# EAGLE board SysnapseWriless-BOB-bare-v2a (EAGLE 5.10)
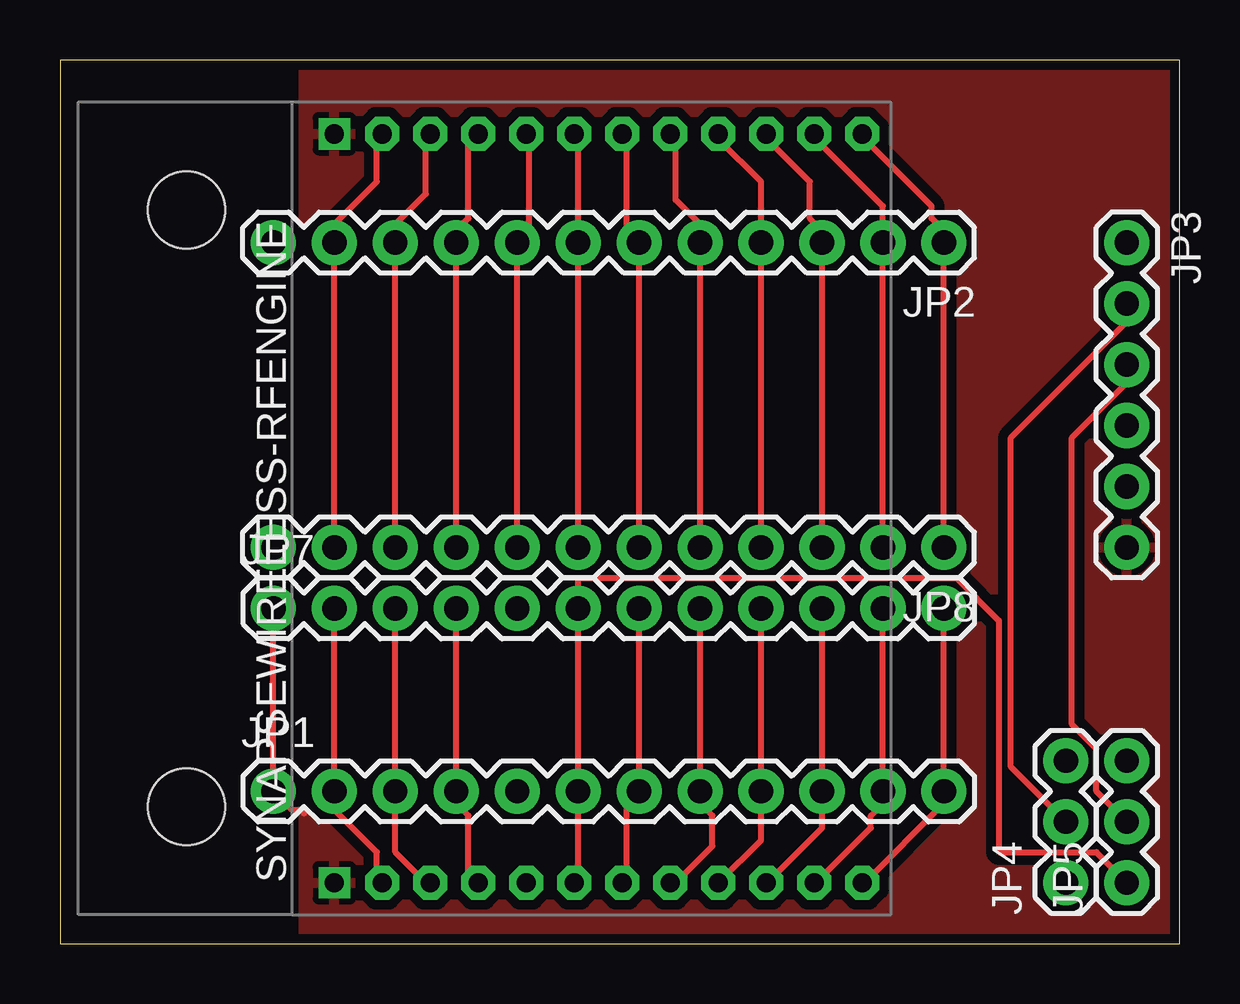
[diagram p0: board, top side]
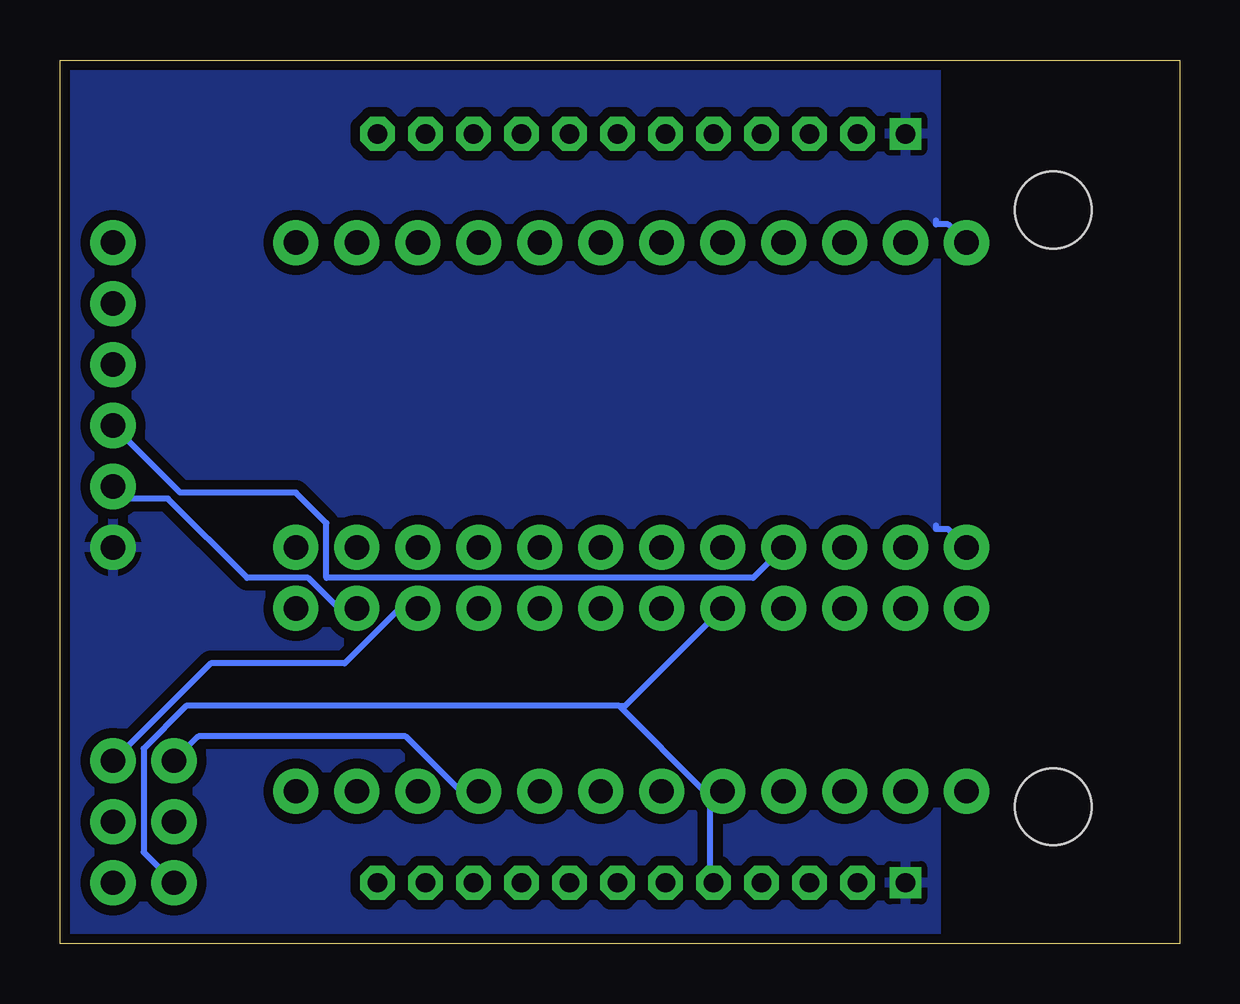
[diagram p1: board, bottom side, seen from below]

Size 46.66 x 36.82 mm. Coordinates in mm from the lower left corner, seen from the top.
Outline: 0,0 46.66,0 46.66,36.82 0,36.82 0,0
Copper layers (1*16): Top 0.035mm / dielectric 1.5mm / Bottom 0.035mm
Design rules "Fusion_eagle_rule_v1.1": minimum track width 6mil, minimum drill 12mil, track to track 6mil, track to pad 6mil, pad to pad 6mil, via to via 6mil, smd to smd 0mil, copper to edge 10mil, drill to drill 10mil, minimum pad ring 10mil, minimum via ring 6mil, stop-mask expansion 2mil, vias tented up to drill 100mil, thermal gap 10mil

## Footprints (pad centres in the part's own frame; a part is rotated, then mirrored left to right if it is on the bottom)
1X12 = drill 1.016 pad 1.88 round: 1 0,0; 2 2.54,0; 3 5.08,0; 4 7.62,0; 5 10.16,0; 6 12.7,0; 7 15.24,0; 8 17.78,0; 9 20.32,0; 10 22.86,0; 11 25.4,0; 12 27.94,0
1X06 = drill 1.016 pad 1.88 round: 1 0,0; 2 2.54,0; 3 5.08,0; 4 7.62,0; 5 10.16,0; 6 12.7,0
1X03 = drill 1.016 pad 1.88 round: 1 0,0; 2 2.54,0; 3 5.08,0
SYNAPSERF100 = drill 0.8 square: 1 0,0; 24 31.2,0 | drill 0.8 pad 1.422 octagon: 2 0,-2; 3 0,-4; 4 0,-6; 5 0,-8; 6 0,-10; 7 0,-12; 8 0,-14; 9 0,-16; 10 0,-18; 11 0,-20; 12 0,-22; 13 31.2,-22; 14 31.2,-20; 15 31.2,-18; 16 31.2,-16; 17 31.2,-14; 18 31.2,-12; 19 31.2,-10; 20 31.2,-8; 21 31.2,-6; 22 31.2,-4; 23 31.2,-2 | hole 3.2: 3.17,6.16; 28.03,6.16

## Placement (x,y rotation side)
JP1  M12PTH  [1X12]  8.89,6.35 0 top
JP2  M12PTH  [1X12]  36.83,29.21 180 top
JP3  [1X06]  44.45,29.21 270 top
JP4  JUMPER-3PTH  [1X03]  41.91,2.54 90 top
JP5  JUMPER-3PTH  [1X03]  44.45,2.54 90 top
JP7  M12PTH  [1X12]  8.89,13.97 0 top
JP8  M12PTH  [1X12]  36.83,16.51 180 top
SYNAPSEWIRELESS-RFENGINE  SYNAPSEWIRELESS-RFENGINESTD  [SYNAPSERF100]  11.43,2.54 90 top

## Library data of the parts
JP1-JP5 JP7 JP8 = SparkFun
SYNAPSEWIRELESS-RFENGINE = 0_jc-custom

## Nets
GND: JP1.1 JP2.12 JP3.6 JP7.1 JP8.12 SYNAPSEWIRELESS-RFENGINE.1 SYNAPSEWIRELESS-RFENGINE.24
GPIO0: JP1.2 JP7.2 SYNAPSEWIRELESS-RFENGINE.2
GPIO1: JP1.3 JP7.3 SYNAPSEWIRELESS-RFENGINE.3
GPIO2: JP1.4 JP7.4 SYNAPSEWIRELESS-RFENGINE.4
GPIO3: JP1.5 JP4.1 JP7.5 SYNAPSEWIRELESS-RFENGINE.5
GPIO4: JP1.6 JP5.1 JP7.6 SYNAPSEWIRELESS-RFENGINE.6
GPIO5: JP1.7 JP7.7 SYNAPSEWIRELESS-RFENGINE.7
GPIO6: JP1.8 JP7.8 SYNAPSEWIRELESS-RFENGINE.8
GPIO7: JP1.9 JP4.3 JP7.9 SYNAPSEWIRELESS-RFENGINE.9
GPIO8: JP1.10 JP5.3 JP7.10 SYNAPSEWIRELESS-RFENGINE.10
GPIO9: JP1.11 JP3.5 JP7.11 SYNAPSEWIRELESS-RFENGINE.11
GPIO10: JP1.12 JP7.12 SYNAPSEWIRELESS-RFENGINE.12
GPIO11: JP2.1 JP8.1 SYNAPSEWIRELESS-RFENGINE.13
GPIO12: JP2.2 JP8.2 SYNAPSEWIRELESS-RFENGINE.14
GPIO13: JP2.3 JP8.3 SYNAPSEWIRELESS-RFENGINE.15
GPIO14: JP2.4 JP8.4 SYNAPSEWIRELESS-RFENGINE.16
GPIO15: JP2.5 JP8.5 SYNAPSEWIRELESS-RFENGINE.17
GPIO16: JP2.6 JP8.6 SYNAPSEWIRELESS-RFENGINE.18
GPIO17: JP2.7 JP8.7 SYNAPSEWIRELESS-RFENGINE.19
GPIO18: JP2.8 JP8.8 SYNAPSEWIRELESS-RFENGINE.20
N$3: JP2.10 JP8.10 SYNAPSEWIRELESS-RFENGINE.22
N$7: JP3.1
RESET_L: JP2.11 JP8.11 SYNAPSEWIRELESS-RFENGINE.23
RXI: JP3.2 JP4.2
TXO: JP3.3 JP5.2
VCC: JP2.9 JP3.4 JP8.9 SYNAPSEWIRELESS-RFENGINE.21

## Tracks (layer width: path | path; a pad name or v marks a point on that pad's centre or on a via)
GND
  Top 0.254: 10.16,5.43 10.16,5.59 9.65,5.59 JP1.1 JP7.1
  Bottom 0.254: JP8.12 9.65,17.27 10.16,17.27 10.16,17.43 | JP2.12 9.65,29.97 10.16,29.97 10.16,30.13
  pour Bottom (isolate 0.406): 10.16,36.83 46.99,36.83 46.99,0 10.16,0
  pour Top (isolate 0.406): 10.16,36.83 46.99,36.83 46.99,0 10.16,0
GPIO0
  Top 0.254: SYNAPSEWIRELESS-RFENGINE.2 13.21,2.54 13.21,3.81 11.43,5.59 JP1.2 JP7.2
GPIO1
  Top 0.254: SYNAPSEWIRELESS-RFENGINE.3 15.24,2.54 13.97,3.81 JP1.3 JP7.3
GPIO2
  Top 0.254: SYNAPSEWIRELESS-RFENGINE.4 17.27,2.54 17.02,2.79 17.02,5.33 16.51,5.84 JP1.4 JP7.4
GPIO3
  Bottom 0.254: 19.56,6.35 19.56,2.54 SYNAPSEWIRELESS-RFENGINE.5 | JP4.1 43.18,3.81 43.18,8.13 41.4,9.91 23.37,9.91 | 23.37,9.91 19.81,6.35 19.56,6.35 | 19.56,6.35 JP1.5 | JP7.5 23.11,9.91 23.37,9.91
GPIO4
  Top 0.254: SYNAPSEWIRELESS-RFENGINE.6 21.59,2.54 JP1.6 JP7.6 21.59,15.24 37.34,15.24 39.12,13.46 39.12,3.81 43.18,3.81 JP5.1
GPIO5
  Top 0.254: SYNAPSEWIRELESS-RFENGINE.7 23.62,2.54 23.62,6.35 JP1.7 JP7.7
GPIO6
  Top 0.254: SYNAPSEWIRELESS-RFENGINE.8 25.65,2.54 27.18,4.06 27.18,5.33 26.67,5.84 JP1.8 JP7.8
GPIO7
  Top 0.254: SYNAPSEWIRELESS-RFENGINE.9 29.21,4.32 JP1.9 JP7.9
  Bottom 0.254: JP4.3 40.89,8.64 32.26,8.64 29.97,6.35 JP1.9
GPIO8
  Top 0.254: SYNAPSEWIRELESS-RFENGINE.10 29.46,2.54 31.75,4.83 JP1.10 JP7.10
  Bottom 0.254: JP5.3 40.39,11.68 34.8,11.68 32.51,13.97 JP7.10
GPIO9
  Top 0.254: SYNAPSEWIRELESS-RFENGINE.11 31.5,2.54 33.78,4.83 33.78,5.33 34.29,5.84 JP1.11 JP7.11
  Bottom 0.254: JP3.5 43.94,18.54 42.16,18.54 38.86,15.24 36.32,15.24 35.05,13.97 JP7.11
GPIO10
  Top 0.254: SYNAPSEWIRELESS-RFENGINE.12 33.53,2.54 36.83,5.84 JP1.12 JP7.12
GPIO11
  Top 0.254: SYNAPSEWIRELESS-RFENGINE.13 33.53,33.53 36.32,30.73 36.32,30.23 36.83,29.72 JP2.1 JP8.1
GPIO12
  Top 0.254: SYNAPSEWIRELESS-RFENGINE.14 31.5,33.53 34.29,30.73 JP2.2 JP8.2
GPIO13
  Top 0.254: SYNAPSEWIRELESS-RFENGINE.15 29.46,33.53 31.24,31.75 31.24,30.23 31.75,29.72 JP2.3 JP8.3
GPIO14
  Top 0.254: SYNAPSEWIRELESS-RFENGINE.16 27.43,33.53 29.21,31.75 JP2.4 JP8.4
GPIO15
  Top 0.254: SYNAPSEWIRELESS-RFENGINE.17 25.65,33.53 25.65,30.99 26.67,29.97 JP2.5 JP8.5
GPIO16
  Top 0.254: SYNAPSEWIRELESS-RFENGINE.18 23.62,33.53 23.62,29.21 JP2.6 JP8.6
GPIO17
  Top 0.254: SYNAPSEWIRELESS-RFENGINE.19 21.59,33.53 JP2.7 JP8.7
GPIO18
  Top 0.254: SYNAPSEWIRELESS-RFENGINE.20 19.56,33.53 19.56,29.21 JP2.8 JP8.8
N$3
  Top 0.254: SYNAPSEWIRELESS-RFENGINE.22 15.24,33.53 15.24,31.24 13.97,29.97 JP2.10 JP8.10
RESET_L
  Top 0.254: SYNAPSEWIRELESS-RFENGINE.23 13.21,33.53 13.21,31.75 11.43,29.97 JP2.11 JP8.11
RXI
  Top 0.254: JP4.2 39.62,7.37 39.62,21.08 44.45,25.91 JP3.2
TXO
  Top 0.254: JP5.2 43.18,6.35 43.18,8.13 42.16,9.14 42.16,21.08 44.45,23.37 JP3.3
VCC
  Top 0.254: SYNAPSEWIRELESS-RFENGINE.21 17.27,33.53 17.02,33.27 17.02,30.23 16.51,29.72 JP2.9 JP8.9
  Bottom 0.254: JP3.4 41.66,18.8 36.83,18.8 35.56,17.53 35.56,15.24 17.78,15.24 JP8.9

## Text on the board
tDocu: FTDI | RXI | TXO | VCC | CTS | 20100928 | GND | Synapse-BOB-bare 2A | RX | TX | 1 | UART | 0
bDocu: 2.7-3.4 | GND | RESET_L | PTG0/BKDG | VCC | GPIO18_AD0 | GPIO17_AD1 | GPIO16_AD2 | GPIO15_AD3 | GPIO14_AD4 | GPIO13_AD5 | GPIO12_AD6 | GPIO11_AD7 | GND | GPIO0 | GPIO1 | GPIO2 | RX0 | TX0 | 5_CTS0 | 6_RTS0 | 7_RX1 | 8_TX1 | 9_CTS1 | 10_RTS1 | J.C. Woltz